# Altium PCB PCB4.PcbDoc
Units mm, origin at the board's own origin, x right, y up, seen from the top; angles counter-clockwise.
Board outline 100 x 70 mm, 2 copper layers (Top Layer, Bottom Layer); 14 components, 7 nets, 32 pads, 0 vias.
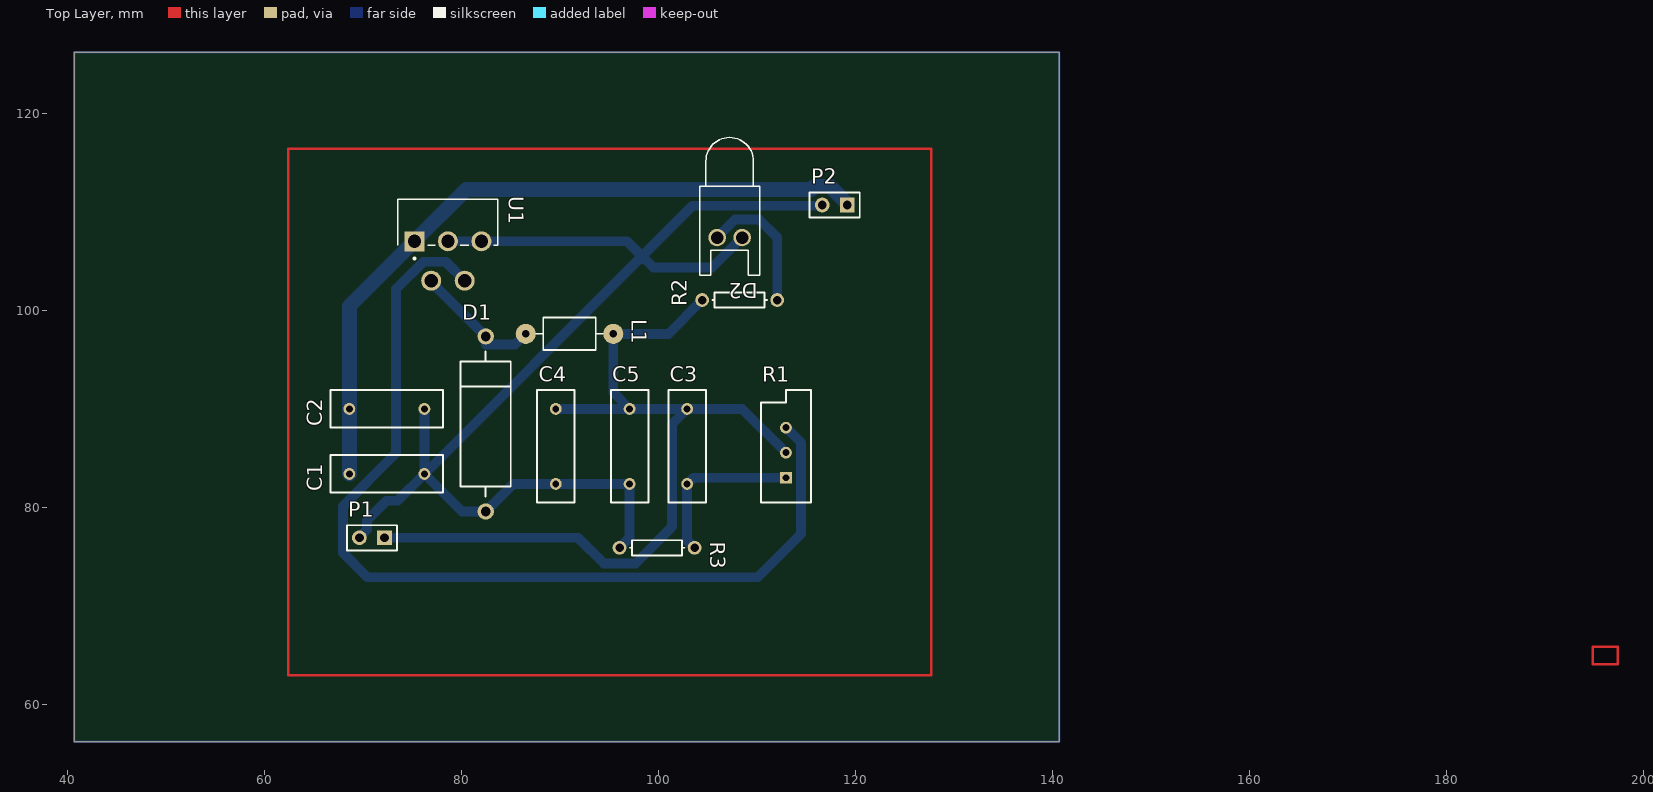
[diagram p0: Top Layer view]
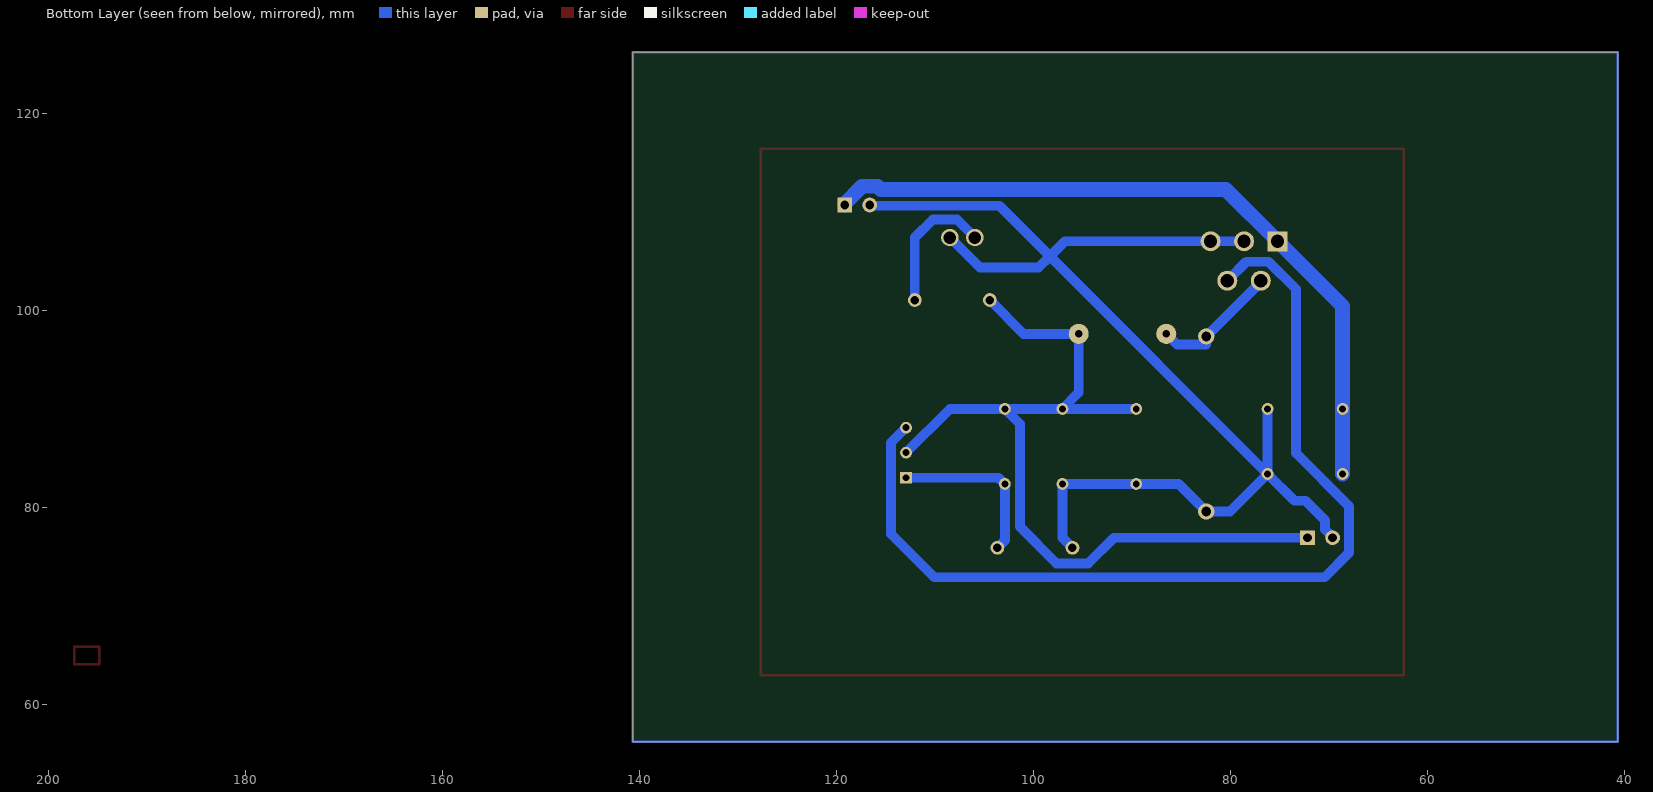
[diagram p1: Bottom Layer view, seen from below]

## Layer stack, top to bottom
Top Solder: solder mask 0.0102, Solder Resist, Dk 3.5
Top Layer: signal copper 0.0356
Dielectric 1: dielectric 0.32, FR-4, Dk 4.8
Bottom Layer: signal copper 0.0356
Bottom Solder: solder mask 0.0102, Solder Resist, Dk 3.5

## Board outline
40.64,56.261 40.64,126.261 140.64,126.261 140.64,56.261

## Design rules (kind name [scope] priority, off if disabled: settings)
Clearance [All] p1: gap=0.4 ignorepadtopadclearanceinfootprint=FALSE
PolygonConnect [All] p1: connectstyle=Relief reliefconductorwidth=0.254 reliefentries=4 polygonreliefangle="90 Angle" airgapwidth=0.254
RoomDefinition Sheet5 [InComponentClass('Sheet5')] p1: confinementstyle=ConfineIn formatcopy=TRUE lockcomponents=FALSE outline 172.339,58.039 241.935,58.039 241.935,75.057 172.339,75.057
RoutingLayers [All] p1: top layer_v5=FALSE bottom layer_v5=TRUE
RoutingVias [All] p1: holewidth=0.711 width=1.27 viastyle="Through Hole" minholewidth=0.711 minwidth=1.27 maxholewidth=0.711 maxwidth=1.27
SolderMaskExpansion [All] p1: expansion=0.102 istentingtop=FALSE
Width vcc [InNet('VCC_input')] p1: maxlimit=1.5 minlimit=1.5 preferedwidth=1.5
Width gnd [InNet('GND')] p2: maxlimit=1 minlimit=1 preferedwidth=1
Width [All] p3: maxlimit=1 minlimit=1 preferedwidth=1
29 further rules are at their usual default settings.

## Components (designator, comment, footprint, x,y, rotation, side; value= is the part's Value field where it differs from the comment)
C1 "Cap" RAD-0.3 72.39,83.439 r180 top value=100uF/50V
C2 "Cap" RAD-0.3 72.39,90.043 r180 top value=1uF
C3 "Cap" RAD-0.3 102.87,86.233 r90 top value=23F
C4 "Cap" RAD-0.3 89.535,86.233 r90 top value=100pF/43v
C5 "Cap" RAD-0.3 97.028,86.233 r90 top value=100pF/50v
D1 "D Zener" DIODE-0.7 82.423,88.519 r90 top
D2 "LED0" LED-0 107.188,107.442 r180 top
L1 "33mH" L/0.4 86.487,97.663 r0 top value="150 mH"
P1 "Header 2" HDR1X2 72.136,76.962 r180 top
P2 "Header 2" HDR1X2 119.126,110.744 r180 top
R1 "RPot" VR5 112.903,85.598 r90 top value=10K
R2 "Res1" AXIAL-0.3 108.204,101.092 r180 top value=1K
R3 "Res1" AXIAL-0.3 99.822,75.946 r0 top value=1K
U1 "LM2596T-ADJ" TO170P1016X470X2092-5 75.184,107.061 r0 top

## Footprints (in the part's own frame and the unit in brackets; to place one, negate y for a bottom-side part, rotate by r counter-clockwise, add the part's x,y. Pads: shape width x height; smd on the part's side, far side on the other; paste and mask are expansions set on the pad)
AXIAL-0.3 [mm] "Axial Device, Thru-Hole; 2 Leads; 0.3 in Pin Spacing"
  round 1.4 hole 0.85: 1(-3.81,0) 2(3.81,0)
  silkscreen extent -2.77,-0.76 2.77,0.76
DIODE-0.7 [mm] "Diode, Thru-Hole; 2 Leads; 0.7 in Pin Spacing"
  round 1.65 hole 1: 1(-8.89,0) 2(8.89,0)
  silkscreen extent -7.37,-2.54 7.37,2.54
HDR1X2 [mm] "Connector; Header; 2 Position"
  rect 1.5x1.5 hole 0.9: 1(0,0)
  round 1.5 hole 0.9: 2(2.54,0)
  silkscreen extent -1.27,-1.27 3.81,1.27
L/0.4 [mil]
  round 80 hole 31: 1(0,0) 2(350,0)
  silkscreen extent 40,-65 310,65
LED-0 [mil] "LED; 2 Leads"
  round 70 hole 50: 1(50,0) 2(-50,0)
  silkscreen extent -120,-400 120,150
RAD-0.3 [mm] "Radial Cap, Thru-Hole; 2 Leads; 0.3 in Pin Spacing"
  round 1.2 hole 0.7: 1(-3.81,0) 2(3.81,0)
  silkscreen extent -5.71,-1.91 5.71,1.91
TO170P1016X470X2092-5 [mm]
  rect 2.025x2.025 / inner round 2.025 / far side rect 2.025x2.025 hole 1.35: 1(0,0)
  round 2.025 hole 1.35: 2(1.7,-4) 3(3.4,0) 4(5.1,-4) 5(6.8,0)
  silkscreen extent -1.68,-1.85 8.48,4.28, body extent -5.08,-3.66 5.08,4.81, height 20.93
VR5 [mm] "Thru-Hole; 3 Leads"
  rect 1.2x1.2 hole 0.7: 1(-2.54,0)
  round 1.2 hole 0.7: 2(0,0) 3(2.54,0)
  silkscreen extent -5.08,-2.54 6.35,2.54

## Part data
C1 C2 C3 C4 C5: "Capacitor", LatestRevisionDate=17-Jul-2002, LatestRevisionNote="Re-released for DXP Platform.", PackageDescription="Radial Cap, Thru-Hole; 2 Leads; 0.3 in Pin Spacing", PackageReference=RAD-0.3, Published=8-Jun-2000, Publisher="Altium Limited"
D1: "Zener Diode", LatestRevisionDate=17-Jul-2002, LatestRevisionNote="Re-released for DXP Platform.", PackageDescription="Diode, Thru-Hole; 2 Leads; 0.7 in Pin Spacing", PackageReference=DIODE-0.7, Published=8-Jun-2000, Publisher="Altium Limited"
D2: "Typical INFRARED GaAs LED", LatestRevisionDate=08-Jul-2005, LatestRevisionNote="Mech Layer 1 removed.", PackageDescription="LED; 2 Leads", PackageReference=LED-0, Published=8-Jun-2000, Publisher="Altium Limited"
L1: library part L1, "Inductor"
P1 P2: "Header, 2-Pin", LatestRevisionDate=17-Jul-2002, LatestRevisionNote="Re-released for DXP Platform.", Publisher="Altium Limited"
R1: "Potentiometer", LatestRevisionDate=17-Jul-2002, LatestRevisionNote="Re-released for DXP Platform.", PackageDescription="Variable Resistor, Thru-Hole; 3 Leads", PackageReference=VR5, Published=8-Jun-2000, Publisher="Altium Limited", Set Position=0.5, Sim Note="Enter the Resistance value and the set point into parameter fields."
R2 R3: "Resistor", LatestRevisionDate=17-Jul-2002, LatestRevisionNote="Re-released for DXP Platform.", PackageDescription="Axial Device, Thru-Hole; 2 Leads; 0.3 in Pin Spacing", PackageReference=AXIAL-0.3, Published=8-Jun-2000, Publisher="Altium Limited"
U1: "SIMPLE SWITCHER&reg; 4.5V to 40V, 3A Low Component Count Step-Down Regulator 5-TO-220 -40 to 125", Package="TO-220-5 Texas Instruments", Check_prices=https://www.snapeda.com/parts/LM2596T-ADJ/Texas+Instruments/view-part/?ref=eda, MF="Texas Instruments", MP=LM2596T-ADJ, SnapEDA_Link=https://www.snapeda.com/parts/LM2596T-ADJ/Texas+Instruments/view-part/?ref=snap

## Nets (pads, with @x,y where several pads share a name; then routed paths per layer and width w, separated by ;. In a path a pad name is that pad's centre, name@x,y a point inside that pad or via, vN(x,y) a via of type N, cw(c..) or ccw(c..) an arc to the next point about the centre after c; other vN are vias at no path point)
GND: C1.1 C2.1 C4.1 C5.1 D1.1 D2.2 P1.2 P2.2 R3.1 U1.3 U1.5 | length 131.1
  Bottom Layer w1: P1.2 69.596,77.036 70.358,77.798 70.358,78.74 72.339,80.721 73.482,80.721 C1.1 ; C2.1 C1.1 ; U1.3 U1.5 96.774,107.061 98.298,105.537 ; R3.1 97.028,76.962 C5.1 C4.1 85.217,82.423 D1.1 80.01,79.629 C1.1 ; D2.2 105.41,104.394 99.441,104.394 98.298,105.537 ; P2.2@116.817,110.671 103.432,110.671 98.298,105.537 ; C1.1 98.298,105.537
NetC3_1: C3.1 R1.1 R3.2 | length 17.1
  Bottom Layer w1: R3.2 102.87,76.708 C3.1 103.505,83.058 R1.1
NetD1_2: D1.2 L1.1 U1.2 | length 13.3
  Bottom Layer w1: U1.2 76.884,102.948 D1.2 82.423,96.571 85.395,96.571 L1.1
NetD2_1: D2.1 R2.1 | length 14
  Bottom Layer w1: D2.1 107.747,109.271 110.185,109.271 112.014,107.442 R2.1
NetR1_3: R1.3 U1.4 | length 98.7
  Bottom Layer w1: U1.4 78.367,104.978 76.096,104.978 73.33,102.212 73.33,85.547 67.945,80.162 67.945,75.438 70.437,72.946 110.03,72.946 114.427,77.343 114.427,86.614 R1.3
VCC_input: C1.2 C2.2 P2.1 U1.1 | length 73.5
  Bottom Layer w1.5: C1.2 C2.2 68.58,100.457 U1.1 80.444,112.321 115.476,112.321 115.799,112.644 117.373,112.644 119.126,110.891 P2.1
VCC_output: C3.2 C4.2 C5.2 L1.2 P1.1 R1.2 R2.2 | length 88.4
  Bottom Layer w1: P1.1 91.796,76.962 94.412,74.346 97.612,74.346 101.346,78.08 101.346,88.519 C3.2 ; C4.2 C5.2 ; R2.2 100.965,97.663 L1.2 95.377,91.694 C5.2 ; R1.2 108.458,90.043 C3.2 ; C5.2 C3.2
copper on no net: | length 586.1
  Top Layer w0.254: 62.357,62.992 127.635,62.992 127.635,116.459 62.357,116.459 62.357,62.992 ; 194.818,64.135 197.358,64.135 197.358,65.913 194.818,65.913 194.818,64.135
  Bottom Layer w0.254: 40.64,56.261 140.64,56.261 140.64,126.261 40.64,126.261 40.64,56.261